# Altium PCB PCB1-LTC2949-V1.PcbDoc
Units mil, origin at the board's own origin, x right, y up, seen from the top; angles counter-clockwise.
Board outline 2590 x 2600 mil, 2 copper layers (Top Layer, Bottom Layer); 50 components, 52 nets, 164 pads, 8 vias.
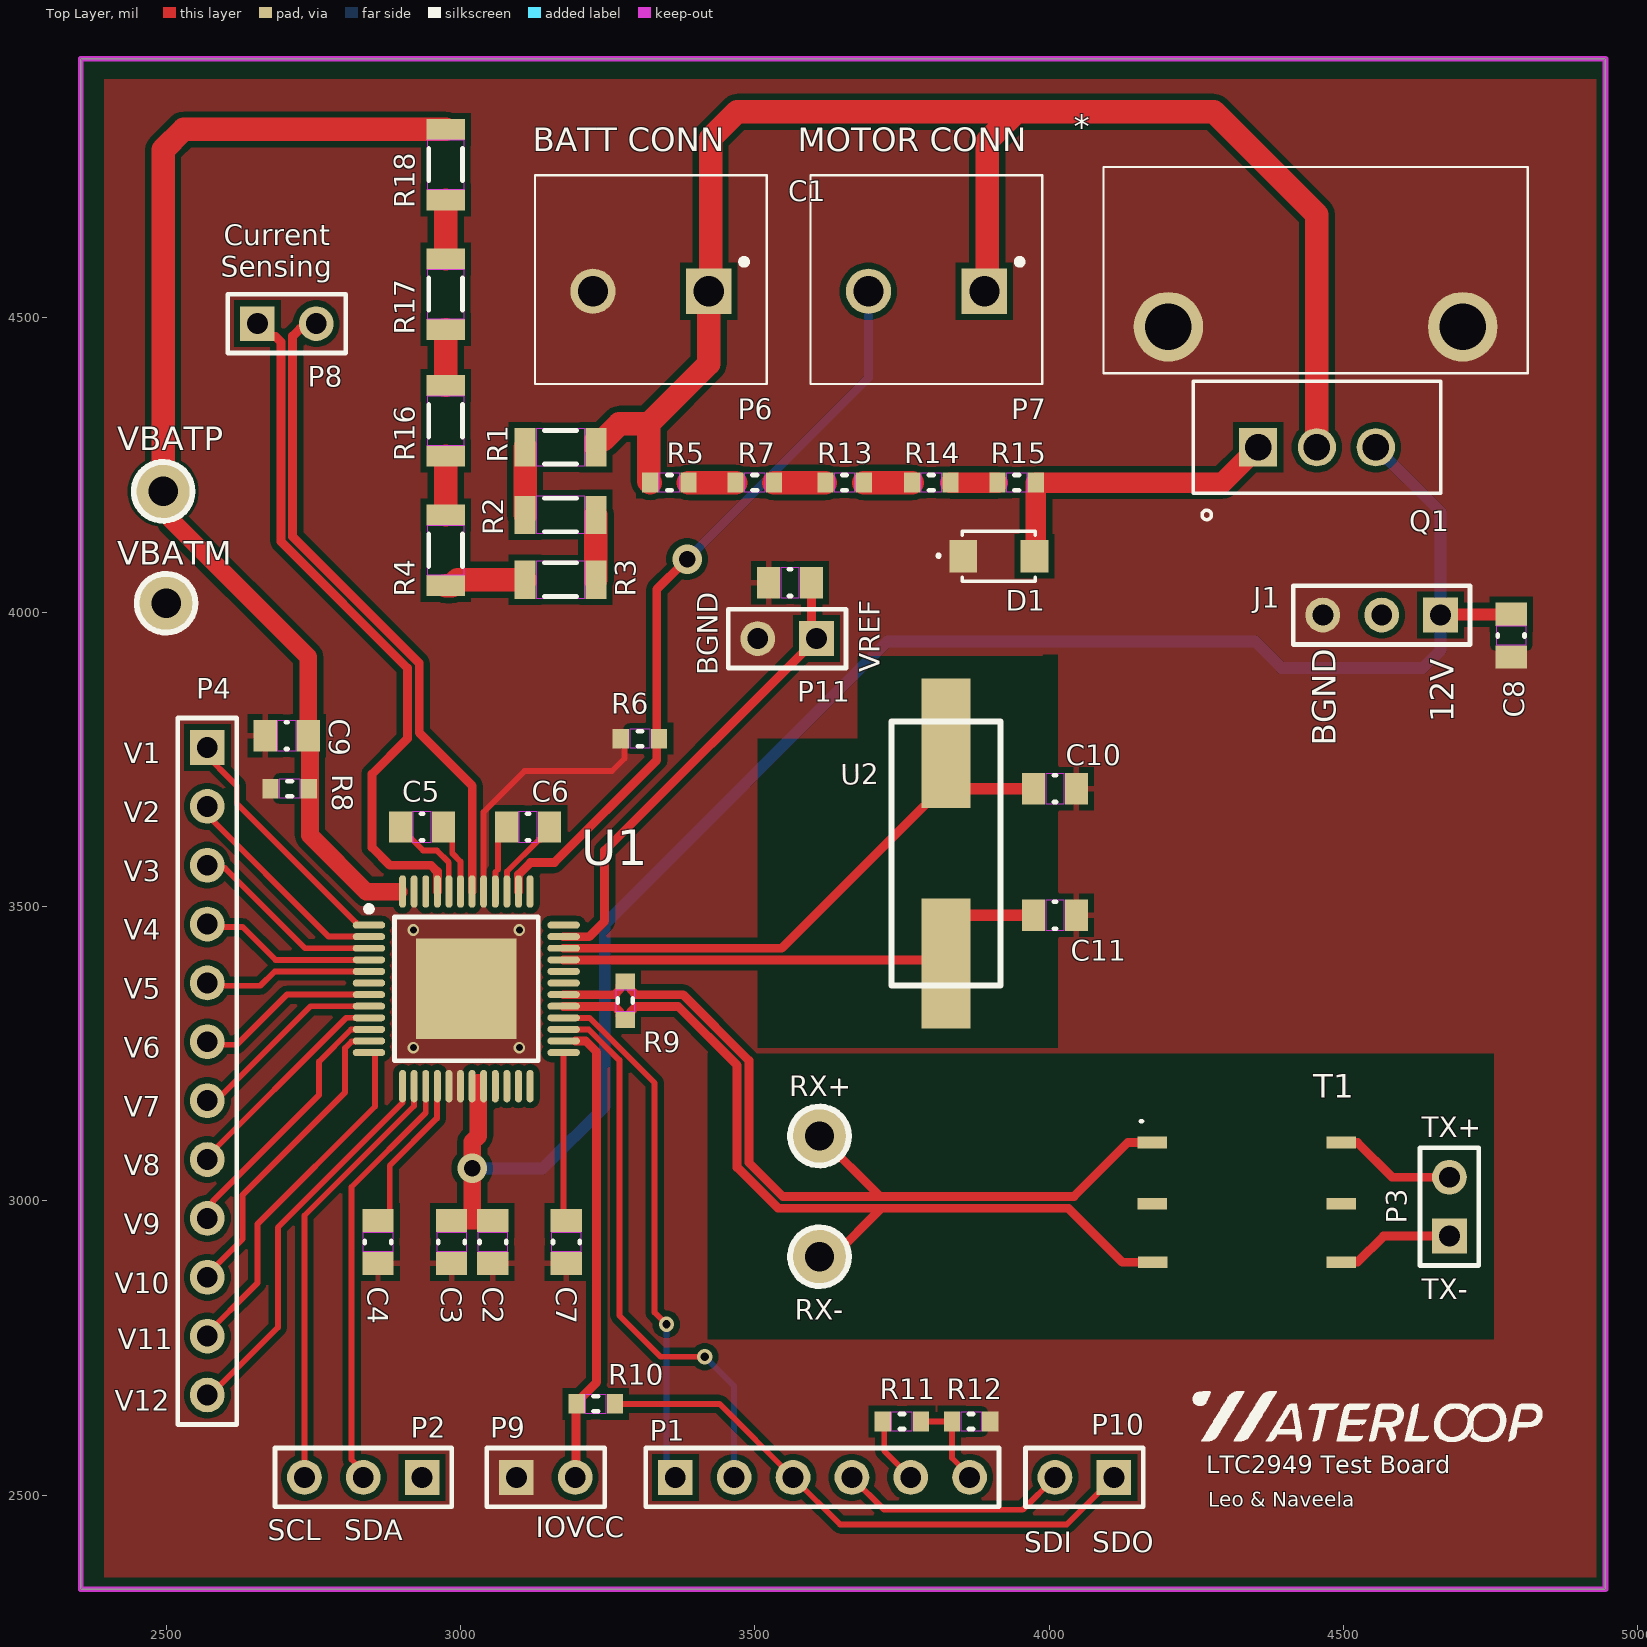
[diagram p0: Top Layer view]
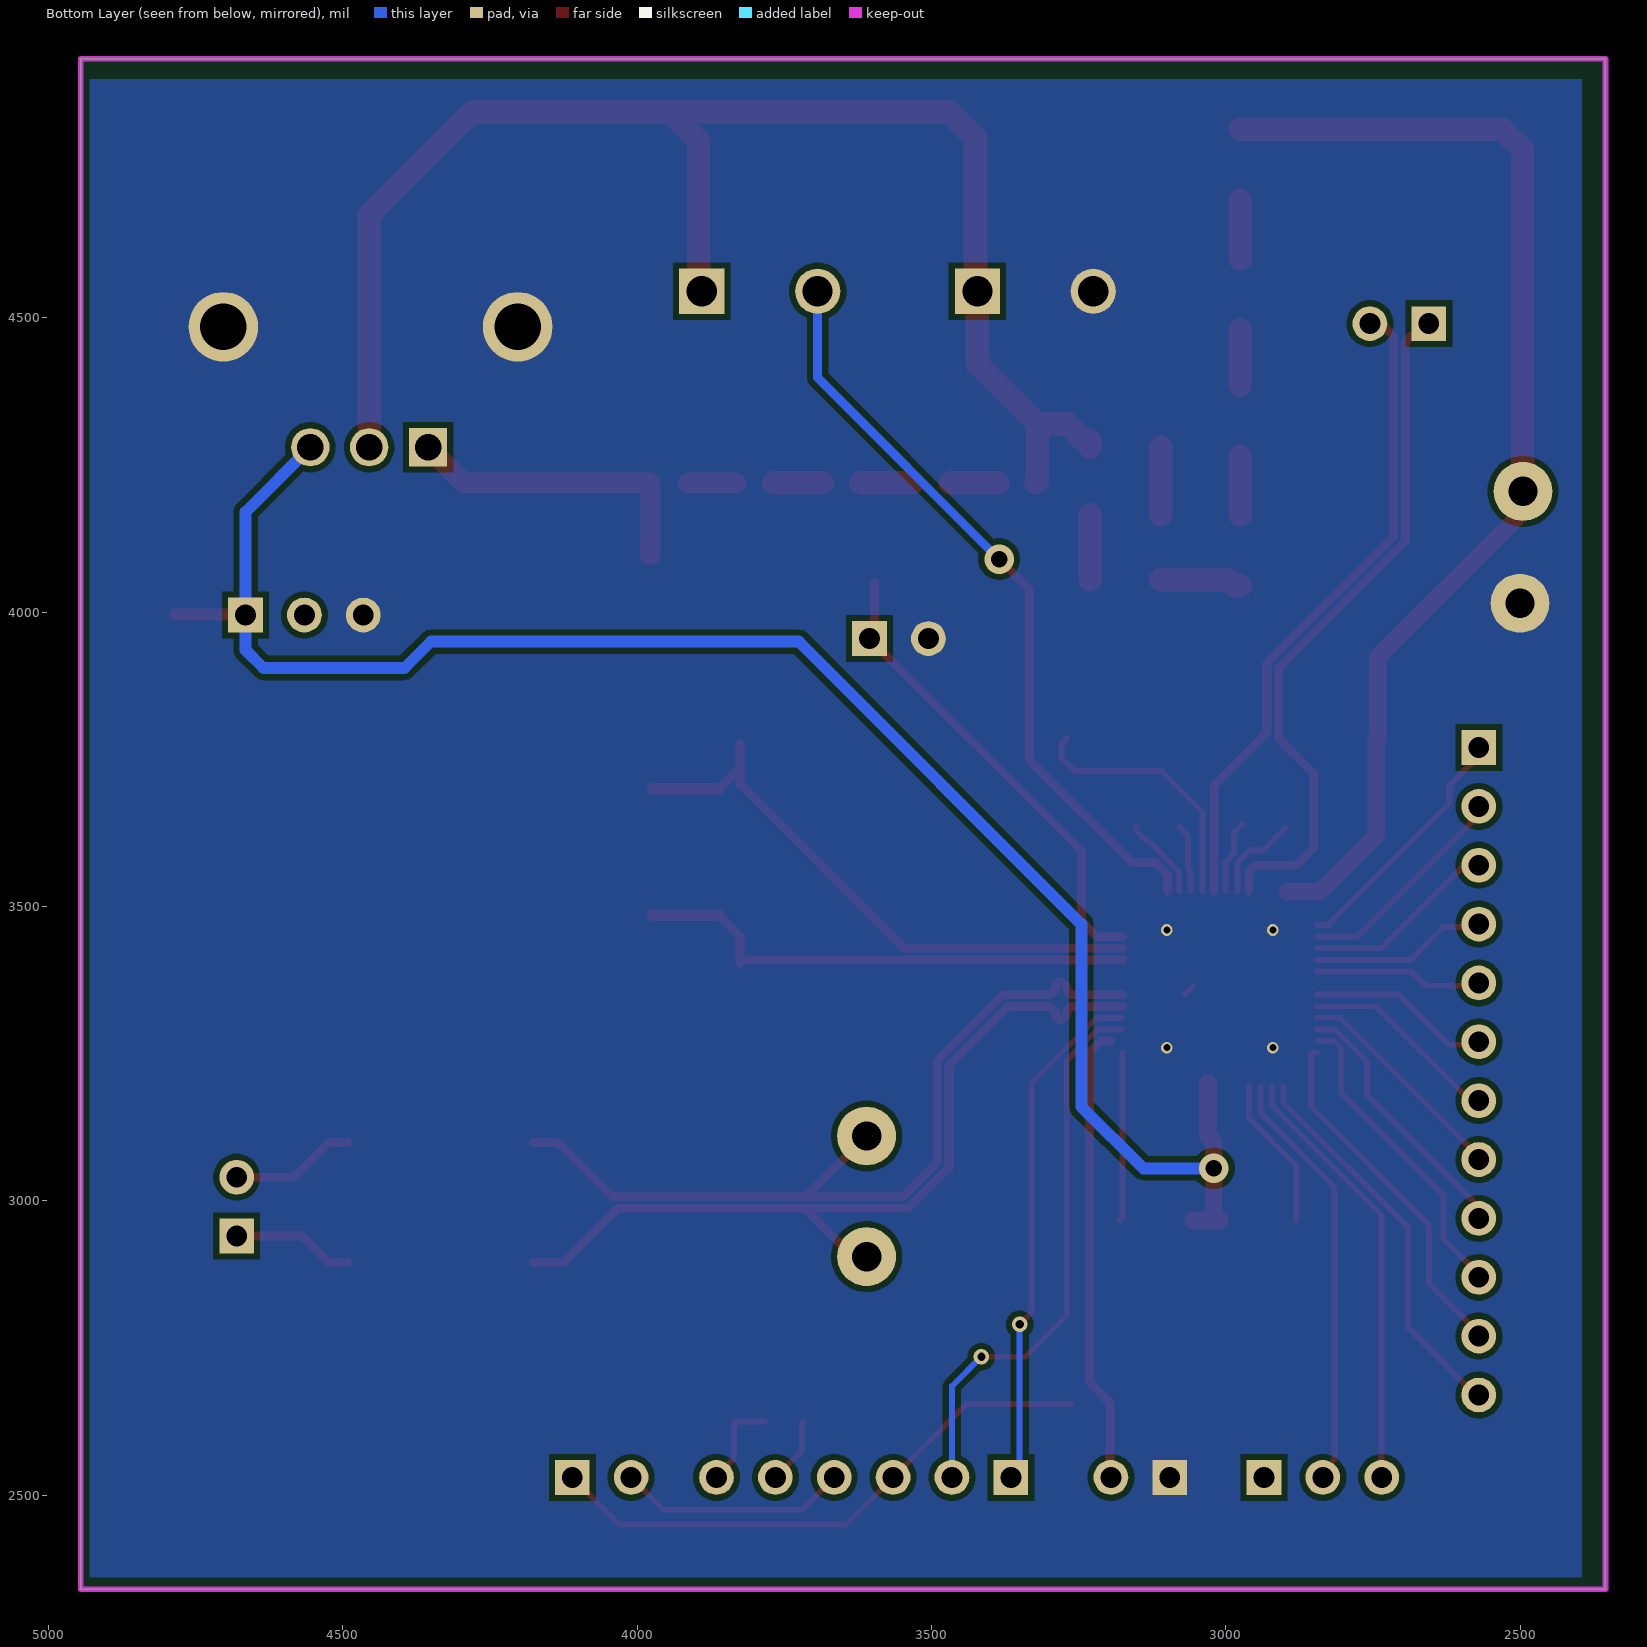
[diagram p1: Bottom Layer view, seen from below]
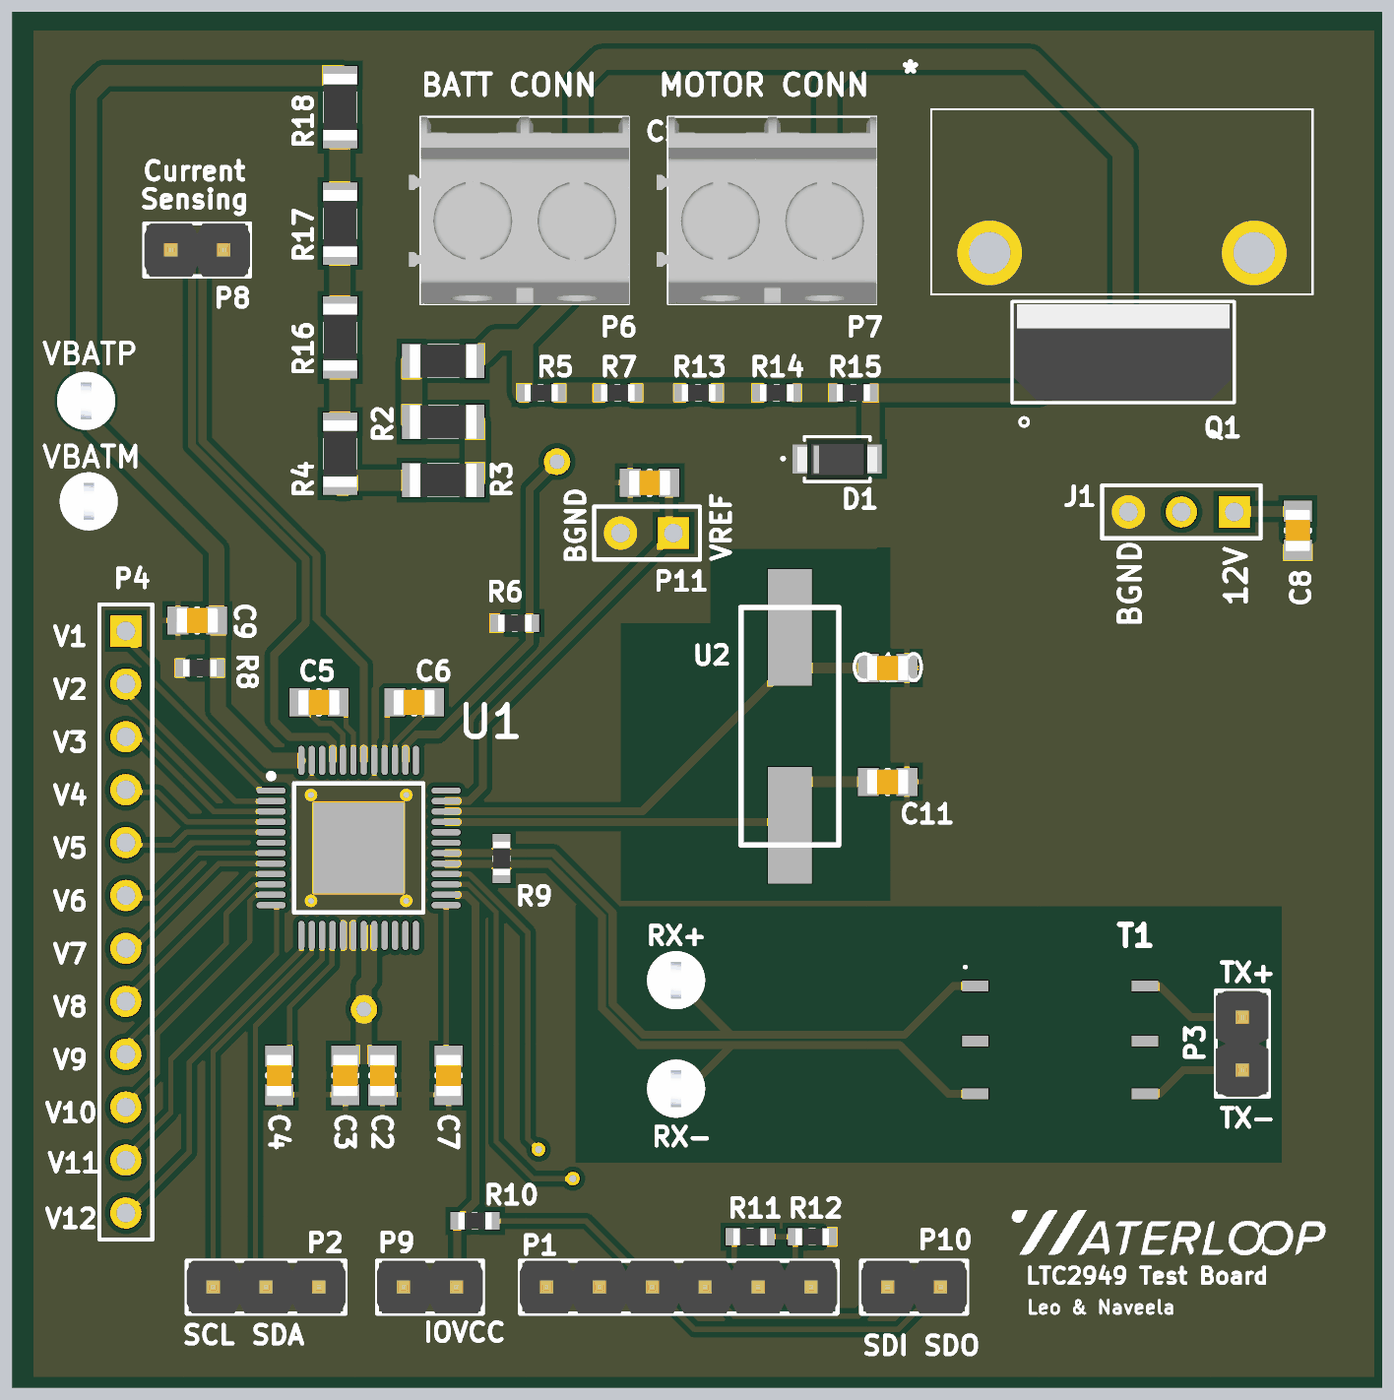
[diagram p2: 3D render of the assembled board from above, using the file's embedded part models]

## Layer stack, top to bottom
Top Solder: solder mask 0.4, Solder Resist, Dk 3.5
Top Layer: signal copper 1.4
Dielectric 1: dielectric 12.6, FR-4, Dk 4.8
Bottom Layer: signal copper 1.4
Bottom Solder: solder mask 0.4, Solder Resist, Dk 3.5

## Board outline
2355,2340 2355,4940 4945,4940 4945,2340

## Design rules (kind name [scope] priority, off if disabled: settings)
Clearance [All] p1: gap=10 ignorepadtopadclearanceinfootprint=FALSE except(5: Arc-Arc Arc-Track Arc-SMDPad Track-Track Track-SMDPad SMDPad-SMDPad)
DiffPairsRouting [All] p1: maxlimit=10 minlimit=4 mostfreqgap=5 toplayer_minwidth=10 toplayer_maxwidth=25 toplayer_prefwidth=15 bottomlayer_minwidth=10 bottomlayer_maxwidth=25 bottomlayer_prefwidth=15 maxuncoupledlength=500
PolygonConnect PolygonConnect_11 [All vs InComponent('C11')] p1: connectstyle=Relief reliefconductorwidth=10 reliefentries=4 polygonreliefangle="90 Angle" airgapwidth=10
PolygonConnect PolygonConnect_10 [All vs InComponent('C10')] p2: connectstyle=Relief reliefconductorwidth=10 reliefentries=4 polygonreliefangle="90 Angle" airgapwidth=10
PolygonConnect PolygonConnect_9 [All vs IsNamedPolygon('BGND_L01_P005') AND InComponent('C10')] p3: connectstyle=Relief reliefconductorwidth=10 reliefentries=4 polygonreliefangle="90 Angle" airgapwidth=10
PolygonConnect PolygonConnect_8 [All vs InComponent('C2') OR InComponent('C3') OR InComponent('C4') OR InComponent('C5') OR InComponent('C6') OR InComponent('C7') OR InComponent('C9')] p4: connectstyle=Relief reliefconductorwidth=10 reliefentries=4 polygonreliefangle="90 Angle" airgapwidth=10
PolygonConnect PolygonConnect_7 [All vs InComponent('C1')] p5: connectstyle=Relief reliefconductorwidth=10 reliefentries=4 polygonreliefangle="90 Angle" airgapwidth=10
PolygonConnect PolygonConnect_6 [All vs IsNamedPolygon('BGND_L01_P005')] p6: connectstyle=Direct reliefconductorwidth=10 reliefentries=4 polygonreliefangle="90 Angle" airgapwidth=10
PolygonConnect PolygonConnect_5 [All vs IsNamedPolygon('BGND_L01_P005')] p7: connectstyle=Relief reliefconductorwidth=10 reliefentries=4 polygonreliefangle="90 Angle" airgapwidth=10
PolygonConnect PolygonConnect_4 [All vs IsNamedPolygon('BGND_L01_P005') AND InComponent('C1')] p8: connectstyle=Relief reliefconductorwidth=10 reliefentries=4 polygonreliefangle="90 Angle" airgapwidth=10
PolygonConnect "Thermal Relief" [All vs (InComponent('C1') AND InComponent('C2') AND InComponent('C3') AND InComponent('C4') AND InComponent('C5') AND InComponent('C6') AND InComponent('C7') AND InComponent('C9'))] p9: connectstyle=Relief reliefconductorwidth=10 reliefentries=4 polygonreliefangle="90 Angle" airgapwidth=10
PolygonConnect PolygonConnect_3 [All vs IsNamedPolygon('BGND_L02_P006')] p10: connectstyle=Direct reliefconductorwidth=10 reliefentries=4 polygonreliefangle="90 Angle" airgapwidth=10
PolygonConnect "Direct Connect" [All vs IsNamedPolygon('BGND_L01_P005')] p11: connectstyle=Direct reliefconductorwidth=10 reliefentries=4 polygonreliefangle="90 Angle" airgapwidth=10
PolygonConnect PolygonConnect_2 [All vs IsNamedPolygon('BGND_L01_P005')] p12: connectstyle=Direct reliefconductorwidth=10 reliefentries=4 polygonreliefangle="90 Angle" airgapwidth=10
PolygonConnect PolygonConnect_1 [All vs IsNamedPolygon('BGND_L01_P005')] p13: connectstyle=Direct reliefconductorwidth=10 reliefentries=4 polygonreliefangle="90 Angle" airgapwidth=10
PolygonConnect [All] p14: connectstyle=Relief reliefconductorwidth=10 reliefentries=4 polygonreliefangle="90 Angle" airgapwidth=10
RoutingVias [All] p1: holewidth=28 width=50 viastyle="Through Hole" minholewidth=28 minwidth=50 maxholewidth=28 maxwidth=50
SolderMaskExpansion [All] p1: expansion=1.97 istentingtop=FALSE
Width [All] p1: maxlimit=40 minlimit=10 preferedwidth=15 minimp=50.000000 maximp=50.000000 favimp=50.000000
29 further rules are at their usual default settings.

## Classes and differential pairs
net class V[1..12]: V1 V2 V3 V4 V5 V6 V7 V8 V9 V10 V11 V12
component class "MAIN IC": C1 C2 C3 C4 C5 C6 C7 C8 C9 C10 C11 "Cur Sensing" D1 J1 P1 P8 P9 Q1 R1 R2 R3 R4 R5 R6 R7 R8 R9 R10 R11 R12 R13 R14 R15 R16 R17 R18 RX+ RX- T1 U1 U2 VBATM VBATP
component class CONNECTORS: * P2 P3 P4 P6 P7 P10 P11
differential pair I1: +I1_P -I1_N
differential pair TX: +TX_P -TX_N
differential pair RX: +RX_P -RX_N

## Components (designator, comment, footprint, x,y, rotation, side; value= is the part's Value field where it differs from the comment)
* "Heatsink" "10C/W Vertical Heatsink with Pins for TO-220" 4455,4485 r0 top
C1 "Capacitor - Nonpolarized" "0805 - Capacitor" 3560,4050 r0 top value=1uF
C2 "Nonpolarized Capacitor" "0805 - Capacitor" 3055,2930 r270 top value=1uF
C3 "Nonpolarized Capacitor" "0805 - Capacitor" 2985,2930 r270 top value=1uF
C4 "Nonpolarized Capacitor" "0805 - Capacitor" 2860,2930 r270 top value=1uF
C5 "Nonpolarized Capacitor" "0805 - Capacitor" 2935,3635 r0 top value=1uF
C6 "Nonpolarized Capacitor" "0805 - Capacitor" 3115,3635 r0 top value=1uF
C7 "Nonpolarized Capacitor" "0805 - Capacitor" 3180,2930 r270 top value=1uF
C8 "Nonpolarized Capacitor" "0805 - Capacitor" 4785,3960 r270 top value=0.1uF
C9 "Nonpolarized Capacitor" "0805 - Capacitor" 2705,3790 r0 top value=4.7nF
C10 "Nonpolarized Capacitor" "0805 - Capacitor" 4010,3700 r180 top value=33pF
C11 "Nonpolarized Capacitor" "0805 - Capacitor" 4010,3485 r180 top value=33pF
D1 "Zener" "BZD27C - ZENER DIODES" 3915,4095 r0 top
J1 "1x3 Header" HDR1X3 4665,3995 r180 top
P1 "1x6 Header" HDR1X6 3365,2530 r0 top
P2 "1x3 Header" HDR1X3 2935,2530 r180 top
P3 "1x2 Header" HDR1X2 4680,2940 r90 top
P4 "1x12 Header" HDR1X12 2570,3770 r270 top
P6 "1935161" 1935161 3316.85,4545 r180 top
P7 "1935161" 1935161 3785,4545 r180 top
P8 "1x2 Header" HDR1X2 2655,4490 r0 top
P9 "1x2 Header" HDR1X2 3095,2530 r0 top
P10 "1x2 Header" HDR1X2 4110,2530 r180 top
P11 "1x2 Header" HDR1X2 3605,3955 r180 top
Q1 "NPN" "BJT NPN 800 V 4 A - 90 W Through Hole TO-220" 4454.06,4279.17 r0 top
R1 "Resistor" "1206 - Resistor" 3170,4280 r0 top value=49.9k
R2 "Resistor" "1206 - Resistor" 3170,4165 r180 top value=49.9k
R3 "Resistor" "1206 - Resistor" 3170,4055 r0 top value=49.9k
R4 "Resistor" "1206 - Resistor" 2975,4105 r270 top value=49.9k
R5 "Resistor" "0603 - Resistor" 3355,4220 r180 top value=6.49k
R6 "Resistor" "0603 - Resistor" 3305,3785 r0 top value=100m
R7 "Resistor" "0603 - Resistor" 3500,4220 r180 top value=6.49k
R8 "Resistor" "0603 - Resistor" 2710,3700 r0 top value=10k
R9 "Resistor" "0603 - Resistor" 3280,3340 r90 top value=120
R10 "Resistor" "0603 - Resistor" 3230,2655 r0 top value=5k
R11 "Resistor" "0603 - Resistor" 3750,2625 r180 top value=3k
R12 "Resistor" "0603 - Resistor" 3867.52,2625 r0 top value=1k
R13 "Resistor" "0603 - Resistor" 3652.52,4220 r180 top value=6.49k
R14 "Resistor" "0603 - Resistor" 3800,4220 r180 top value=6.49k
R15 "Resistor" "0603 - Resistor" 3945,4220 r180 top value=6.49k
R16 "Resistor" "1206 - Resistor" 2975,4325 r270 top value=49.9k
R17 "Resistor" "1206 - Resistor" 2975,4540 r270 top value=49.9k
R18 "Resistor" "1206 - Resistor" 2975,4760 r270 top value=49.9k
RX+ "Test Point" "Test Point - 5002" 3610,3110 r90 top
RX- "Test Point" "Test Point - 5002" 3610,2905 r90 top
T1 "HM2101NLT" HM2101NLT 4335,2995 r270 top
U1 "LTC2949" LTC2949 3010,3360 r0 top
U2 "ABLS-4.000MHZ-K4T" ABLS_4MHZ-K4T 3825,3590 r270 top
VBATM "Test Point" "Test Point - 5002" 2500,4015 r90 top
VBATP "Test Point" "Test Point - 5002" 2495,4205 r90 top

## Footprints (in the part's own frame and the unit in brackets; to place one, negate y for a bottom-side part, rotate by r counter-clockwise, add the part's x,y. Pads: shape width x height; smd on the part's side, far side on the other; paste and mask are expansions set on the pad)
"10C/W Vertical Heatsink with Pins for TO-220" [mm]
  round 3 hole 2: 1(-6.409,-0.011) 2(6.291,-0.011)
  silkscreen extent -9.21,-2.01 9.09,6.89
"0603 - Resistor" [mm] "0603 Chip Resistor - IPC Medium Density"
  rect 0.7x0.85 smd: 1(-0.825,0) 2(0.825,0)
  Top Layer keep-out region: -0.45,0.4 -0.45,-0.4 0.45,-0.4 0.45,0.4
  silkscreen extent -0.1,-0.33 0.1,0.33, body extent -0.8,-0.4 0.8,0.4, height 0.45
"0805 - Capacitor" [mm] "0805 Chip Capacitor - IPC Medium Density"
  rect 1x1.35 smd: 1(-0.925,0) 2(0.925,0)
  Top Layer keep-out region: -0.4,0.65 -0.4,-0.65 0.4,-0.65 0.4,0.65
  silkscreen extent -0.05,-0.58 0.05,0.58, body extent -1,-0.6 1,0.6, height 1.2
"1206 - Resistor" [mm] "1206 Chip Resistor - IPC Medium Density"
  rect 0.9x1.65 smd: 1(-1.525,0) 2(1.525,0)
  Top Layer keep-out region: -1.05,0.8 -1.05,-0.8 1.05,-0.8 1.05,0.8
  silkscreen extent -0.7,-0.72 0.7,0.72, body extent -1.6,-0.8 1.6,0.8, height 0.55
1935161 [mm] "Phoenix Contact 1x2 Screw Terminal Block"
  rect 1.95x1.95 hole 1.3: 1(-2.667,0)
  round 1.95 hole 1.3: 2(2.333,0)
  silkscreen extent -5.17,-5 4.83,4, body extent -5.19,-5 5.38,4, height 12.22
ABLS_4MHZ-K4T [mm]
  rect 5.6x2.1 smd: 1(-4.75,0) 2(4.75,0)
  silkscreen extent -5.7,-2.35 5.7,2.35
"BJT NPN 800 V 4 A - 90 W Through Hole TO-220" [mil]
  round 65 hole 45: 1(0.94,0.83) 3(100.94,0.83)
  rect 65x65 hole 45: 2(-99.06,0.83)
  silkscreen extent -209,-122 211,113, body extent -204,-73 206,108, height 776
"BZD27C - ZENER DIODES" [mm]
  rect 1.2x1.4 smd paste+0 mask+0: 1(-1.548,-0.009) 2(1.526,-0.009)
  silkscreen extent -2.62,-1.09 1.56,1.07, body extent -1.91,-0.97 1.9,0.93, height 1.43
HDR1X2 [mm] "Connector; Header; 2 Position"
  rect 1.5x1.5 hole 0.9: 1(0,0)
  round 1.5 hole 0.9: 2(2.54,0)
  silkscreen extent -1.27,-1.27 3.81,1.27, body extent -1.27,-1.27 3.81,1.27, height 8.54
HDR1X3 [mm] "Connector; Header; 3 Position"
  rect 1.5x1.5 hole 0.9: 1(0,0)
  round 1.5 hole 0.9: 2(2.54,0) 3(5.08,0)
  silkscreen extent -1.27,-1.27 6.35,1.27
HDR1X6 [mm] "Connector; Header; 6 Position"
  rect 1.5x1.5 hole 0.9: 1(0,0)
  round 1.5 hole 0.9: 2(2.54,0) 3(5.08,0) 4(7.62,0) 5(10.16,0) 6(12.7,0)
  silkscreen extent -1.27,-1.27 13.97,1.27, body extent -1.27,-1.27 13.97,1.27, height 8.54
HDR1X12 [mm] "Connector; Header; 12 Position"
  rect 1.5x1.5 hole 0.9: 1(0,0)
  round 1.5 hole 0.9: 2(2.54,0) 3(5.08,0) 4(7.62,0) 5(10.16,0) 6(12.7,0) 7(15.24,0) 8(17.78,0) 9(20.32,0) 10(22.86,0) 11(25.4,0) 12(27.94,0)
  silkscreen extent -1.27,-1.27 29.21,1.27
HM2101NLT [mm]
  rect 0.51x1.27 smd: 1(-2.64,-4.05) 2(0,-4.05) 3(2.53,-4.045) 4(2.53,4.095) 5(0,4.095) 6(-2.64,4.095)
  silkscreen extent -3.55,-4.55 -3.55,-4.5, body extent -3.88,-4.35 3.78,4.45, height 0.25
LTC2949 [mm] "LQFP, 48-Leads, IPC Medium Density"
  oval 1.4x0.3 smd mask+0.05: 1(-4.2,2.75) 2(-4.2,2.25) 3(-4.2,1.75) 4(-4.2,1.25) 5(-4.2,0.75) 6(-4.2,0.25) 7(-4.2,-0.25) 8(-4.2,-0.75) 9(-4.2,-1.25) 10(-4.2,-1.75) 11(-4.2,-2.25) 12(-4.2,-2.75) 25(4.2,-2.75) 26(4.2,-2.25) 27(4.2,-1.75) 28(4.2,-1.25) 29(4.2,-0.75) 30(4.2,-0.25) 31(4.2,0.25) 32(4.2,0.75) 33(4.2,1.25) 34(4.2,1.75) 35(4.2,2.25) 36(4.2,2.75)
  oval 0.3x1.4 smd mask+0.05: 13(-2.75,-4.2) 14(-2.25,-4.2) 15(-1.75,-4.2) 16(-1.25,-4.2) 17(-0.75,-4.2) 18(-0.25,-4.2) 19(0.25,-4.2) 20(0.75,-4.2) 21(1.25,-4.2) 22(1.75,-4.2) 23(2.25,-4.2) 24(2.75,-4.2) 37(2.75,4.2) 38(2.25,4.2) 39(1.75,4.2) 40(1.25,4.2) 41(0.75,4.2) 42(0.25,4.2) 43(-0.25,4.2) 44(-0.75,4.2) 45(-1.25,4.2) 46(-1.75,4.2) 47(-2.25,4.2) 48(-2.75,4.2)
  rect 4.35x4.35 smd: 49(0,0)
  silkscreen extent -4.32,-3.1 3.1,3.57, body extent -3.5,-3.5 3.5,3.5, height 1.6
"Test Point - 5002" [mil] "5002 - PCB TEST POINT WHITE .040"
  round 100 hole 50: 1(0,0)
  silkscreen extent -50,-50 50,50, body extent -50,-50 50,50, height 180

## Part data
*: "Vertical Heatsink for TO-220 Package"
C1: "Nonpolarized Capacitor"
C2 C3 C4 C5 C6 C7 C8 C9 C10 C11: library part "Capacitor - Nonpolarized"
D1: "Zener Diode"
J1 P2: "1x3 Pin Header"
P1: "1x6 Pin Header"
P3 P8 P9 P10 P11: "1x2 Pin Header"
P4: "1x12 Pin Header"
P6 P7: "1x2 Screw Terminal Block", Manufacturer="CUI Devices", Manufacturer Part Number=TB002-500-02BE, Supplier Part Number=102-6145-ND, Supplier=Digikey
Q1: "NPN Bipolar Transistor"
T1: "Pulse Transformer 1:1 Surface Mount 150µH, 450µH"
U1: Manufacturer="Analog Devices", Manufacturer Part Number=LTC2949ILXE#3ZZPBF, Supplier Part Number=584-2949ILXE3ZZPBF, Supplier=Mouser
U2: "Crystal Oscillator 4MHz 18pF"

## Via types
v1: diameter 19.68, hole 11.81, Top Layer to Bottom Layer, 4 vias
v2: diameter 50, hole 28, Top Layer to Bottom Layer, 2 vias
v3: diameter 26, hole 14, Top Layer to Bottom Layer, 2 vias

## Nets (pads, with @x,y where several pads share a name; then routed paths per layer and width w, separated by ;. In a path a pad name is that pad's centre, name@x,y a point inside that pad or via, vN(x,y) a via of type N, cw(c..) or ccw(c..) an arc to the next point about the centre after c; other vN are vias at no path point)
+12: C2.1 C3.1 C8.1 J1.1 Q1.3 U1.19 U1.20 | length 3022
  Top Layer w20: J1.1 4665.71,3995.71 4784.29,3995.71 C8.1
  Top Layer w30: C3.1@3010,2966.42 3020,2966.42 ; 3030,3200 3030,3110 3020,3100 v2(3020,3055) 3020,2966.42 ; C2.1 3020,2966.42
  Bottom Layer w20: v2(3020,3055) 3140,3055 3245,3160 3245,3470 3725,3950 4350,3950 4395,3905 4634.53,3905 4665,3935.47 J1.1 4665,4170 Q1.3
BGND: *.1 *.2 C1.1 C2.2 C3.2 C4.2 C7.2 C8.2 C9.1 C10.1 C11.1 D1.1 J1.3 P6.2 P9.1 P11.2 R6.1 R8.1 R12.2 U1.17 U1.18 U1.41 U1.47 U1.49 VBATM.1 | length 467.3
  Top Layer w10: U1.41 3039.53,3660.41 3109.12,3730 3257.41,3730 3278.66,3751.25 3278.66,3776.97 R6.1@3270.63,3785 ; U1.49@3056.87,3363.16 U1.49@3069.87,3350.16
  other v1: 2920,3260 3100,3260 2920,3460 3100,3460
CLKI: C11.2 U1.33 U2.2 | length 861.5
  Top Layer w15: U1.33 3818.78,3409.21 U2.2 3825,3448.66 U2.2@3861.34,3485
  Top Layer w20: U2.2@3861.34,3485 C11.2
CLKO: C10.2 U1.34 U2.1 | length 997.8
  Top Layer w15: U1.34 3545.79,3428.9 3825,3708.11 U2.1@3825,3736.34 ; U2.1 U2.1@3825,3736.34 ; U2.1@3861.34,3700 U2.1@3825,3736.34
  Top Layer w20: U2.1@3861.34,3700 C10.2
I1_N: P8.2 U1.42 | length 1118.6
  Top Layer w15: P8.2 2746.57,4481.57 2727.72,4481.57 2715,4468.85 2715,4128.28 2930,3913.28 2930,3795 3020,3705 U1.42@3020,3525.35
I1_P: P8.1 U1.45 | length 1187.4
  Top Layer w15: P8.1 2677.03,4467.97 2686.21,4467.97 2695,4459.19 2695,4120 2910,3905 2910,3785 2850,3725 2850,3600 2880,3570 2950,3570 2960.79,3559.21 U1.45
IOVCC: P9.2 R10.1 U1.26 | length 781.4
  Top Layer w15: P9.2 3196.26,2531.26 3196.26,2653.74 R10.1 3197.52,2657.95 3231.29,2691.72 3231.29,3252.75 3212.62,3271.42 U1.26@3195.41,3271.42
NetC4_1: C4.1 U1.16 | length 261.7
  Top Layer w10: C4.1@2880,2966.42 2880,3060 2960,3140 2960,3193.86 U1.16
NetC5_1: C5.1 U1.44 | length 155.3
  Top Layer w10: C5.1@2898.58,3633.11 2936.69,3595 2960,3595 2980.13,3574.87 2980.13,3525.7 U1.44
NetC5_2: C5.2 U1.43 | length 126.6
  Top Layer w10: C5.2@2971.42,3640 2986.1,3625.31 2986.1,3590.16 3000.16,3576.11 U1.43
NetC6_1: C6.1 U1.40 | length 117.7
  Top Layer w10: U1.40@3060,3525.35 3059.56,3525.8 3059.56,3558.21 3063.9,3562.55 3063.9,3620.31 C6.1
NetC6_2: C6.2 U1.39 | length 141.6
  Top Layer w10: U1.39 3079.24,3525.7 3079.24,3559.29 3133.38,3613.43 3136.73,3613.43 3151.42,3628.11 C6.2
NetC7_1: C7.1 U1.25 | length 287.2
  Top Layer w10: U1.25 3175.35,2971.06 C7.1
NetC9_2: C9.2 R8.2 R18.1 U1.48 VBATP.1 | length 1952.4
  Top Layer w30: VBATP.1 2508.39,4191.61 2508.39,4156.61 2741.42,3923.58 C9.2 2744.37,3787.05 2744.37,3700 2744.37,3620.63 2840,3525 2895,3525
  Top Layer w40: VBATP.1 2495,4785 2530.04,4820.04 R18.1
NetD1_2: D1.2 Q1.2 R15.1 | length 528.7
  Top Layer w15: D1.2 D1.2@3977.48,4097.06
  Top Layer w35: D1.2@3977.48,4097.06 R15.1 4295,4220 Q1.2
NetP1_1: P1.1 U1.28 | length 884.4
  Top Layer w10: U1.28@3175.8,3310.44 3219.56,3310.44 3330,3200 3330,2810 v3(3350,2790)
  Bottom Layer w10: v3(3350,2790) 3350,2545 P1.1
NetP1_2: P1.2 U1.27 | length 949.8
  Top Layer w10: U1.27 3175.58,3290.87 3217.91,3290.87 3270,3238.79 3270,2805 3340,2735 v3(3415,2735)
  Bottom Layer w10: v3(3415,2735) 3465,2685 P1.2
NetP1_3: P1.3 P10.1 R10.2 | length 965.6
  Top Layer w10: R10.2 3440,2655 P1.3 3645,2450 4030,2450 P10.1
NetP1_4: P1.4 P10.2 | length 390.6
  Top Layer w10: P1.4 3720,2475 3955,2475 P10.2
NetP1_5: P1.5 R11.2 | length 114.7
  Top Layer w10: R11.2 3720,2622.52 3720,2575 P1.5
NetP1_6: P1.6 R11.1 R12.1 | length 160
  Top Layer w10: R11.1 R12.1 R12.1 3835,2562.97 3865,2532.97 P1.6
NetP2_2: P2.2 U1.15 | length 725.2
  Top Layer w10: P2.2 2835,2540.39 2815,2560.39 2815,3023.28 2941.1,3149.39 U1.15
NetP2_3: P2.3 U1.14 | length 741.9
  Top Layer w10: P2.3 2735,2975 2921.07,3161.07 2921.07,3194.3 U1.14
NetP7_2: P7.2 R6.2 U1.38 | length 1282.5
  Top Layer w15: U1.38 3098.93,3525.7 3098.93,3554.23 3119.25,3574.54 3159.54,3574.54 3333.62,3748.62 3333.62,3785 3333.62,4038.62 v2@3380,4085
  Bottom Layer w15: v2(3385,4090) 3693.15,4398.15 P7.2
NetR1_1: R1.1 R2.2 | length 115
  Top Layer w40: R2.2 R1.1
NetR2_1: R2.1 R3.2 | length 110
  Top Layer w40: R3.2 R2.1
NetR3_1: R3.1 R4.2 | length 139.1
  Top Layer w40: R4.2 2985.2,4044.96 2995.24,4055 R3.1
NetR4_1: R4.1 R16.2 | length 99.9
  Top Layer w40: R4.1 R16.2
NetR5_1: R5.1 R7.2 | length 80
  Top Layer w40: R5.1 R7.2
NetR7_1: R7.1 R13.2 | length 87.6
  Top Layer w40: R7.1 R13.2
NetR13_1: R13.1 R14.2 | length 82.5
  Top Layer w40: R13.1 R14.2
NetR14_1: R14.1 R15.2 | length 80
  Top Layer w35: R14.1 R15.2
NetR16_1: R16.1 R17.2 | length 94.9
  Top Layer w40: R16.1 R17.2
NetR17_1: R17.1 R18.2 | length 99.9
  Top Layer w40: R17.1 R18.2
RX_N: R9.1 RX-.1 T1.3 U1.29 | length 1436.4
  Top Layer w15: U1.29@3175.35,3330 3261.98,3330 3270.77,3321.21 R9.1@3270.77,3313.8 ; R9.1 3282.95,3307.52 3289.23,3313.8 3289.23,3321.21 3298.02,3330 3370,3330 3470,3230 3470,3056.72 3539.59,2987.12 3715,2987.12 ; RX-.1 3632.88,2905 3715,2987.12 ; T1.3 4124.61,2895.39 4032.88,2987.12 3715,2987.12
RX_P: R9.2 RX+.1 T1.1 U1.30 | length 1442.7
  Top Layer w15: U1.30@3175.35,3350 3261.98,3350 3270.77,3358.79 R9.2@3270.77,3366.2 ; R9.2 3282.95,3372.48 3289.23,3366.2 3289.23,3358.79 3298.02,3350 3378.28,3350 3490,3238.28 3490,3065 3547.88,3007.12 3712.88,3007.12 ; RX+.1 3712.88,3007.12 ; T1.1 4133.94,3098.94 4042.12,3007.12 3712.88,3007.12
TX_N: P3.1 T1.4 | length 207.3
  Top Layer w15: T1.4@4491.22,2895.39 4523.72,2895.39 4568.33,2940 P3.1
TX_P: P3.2 T1.6 | length 213.2
  Top Layer w15: T1.6@4491.22,3098.94 4523.72,3098.94 4582.66,3040 P3.2
V1: P4.1 U1.1 | length 427
  Top Layer w10: P4.1@2560,3765 2620.06,3704.94 2620.06,3674.94 2822.65,3472.35 2822.65,3469.1 2823.48,3468.27 U1.1
V2: P4.2 U1.2 | length 374.3
  Top Layer w10: P4.2@2560,3665 2776.42,3448.58 U1.2
V3: P4.3 U1.3 | length 341
  Top Layer w10: P4.3@2560,3565 2600,3565 2736.1,3428.9 U1.3
V4: P4.4 U1.4 | length 307.8
  Top Layer w10: P4.4@2560,3465 2630,3465 2685.79,3409.21 U1.4
V5: P4.5 U1.5 | length 294.8
  Top Layer w10: P4.5@2560,3365 2560.16,3365.16 2660.16,3365.16 2684.53,3389.53 U1.5
V6: P4.6 U1.7 | length 319.9
  Top Layer w10: P4.6@2560,3265 2620,3265 2705.16,3350.16 U1.7
V7: P4.7 U1.8 | length 353.2
  Top Layer w10: P4.7@2560,3165 2569.39,3174.39 2589.39,3174.39 2745.47,3330.47 U1.8
V8: P4.8 U1.9 | length 386.5
  Top Layer w10: P4.8@2560,3065 2805.79,3310.79 U1.9
V9: P4.9 U1.10 | length 451
  Top Layer w10: P4.9@2567.5,2972.5 2579.39,2984.39 2579.39,2999.39 2760,3180 2760,3236.51 2814.24,3290.76 2844.3,3290.76 U1.10
V10: P4.10 U1.11 | length 540.5
  Top Layer w10: P4.10@2560,2865 2630,2935 2630,3010 2804.21,3184.21 2804.21,3259.51 2815.21,3270.51 2821.6,3270.51 2822.16,3271.07 U1.11@2844.3,3271.07
V11: P4.11 U1.12 | length 618.8
  Top Layer w10: P4.11@2560,2765 2655,2860 2655,2960 2855,3160 2855,3250.9 2854.16,3251.73 U1.12
V12: P4.12 U1.13 | length 677.1
  Top Layer w10: P4.12@2560,2665 2570,2665 2690,2785 2690,2954.85 2901.73,3166.58 U1.13
VBAT: P6.1 P7.1 Q1.1 R1.2 R5.2 | length 2585.9
  Top Layer w40: R1.2 3230.04,4290.2 3232.32,4292.48 3242.52,4292.48 3270.04,4320 3320,4320 ; R5.2 3320,4222.52 3320,4320 ; P7.1 3895,4550 3895,4800 3945,4850 ; Q1.1 4455,4675 4280,4850 3945,4850 ; 3320,4320 3421.85,4421.85 P6.1 3425,4548.15 3425,4805 3470,4850 3945,4850
VREF: C1.2 P11.1 U1.35 | length 808.3
  Top Layer w15: U1.35 3218.58,3448.58 3245,3475 3245,3595 P11.1 3596.42,3963.58 C1.2
pads on no net: J1.2 P2.1 T1.2 T1.5 U1.6 U1.21 U1.22 U1.23 U1.24 U1.31 U1.32 U1.36 U1.37 U1.46

## Polygon pours and split planes (outlines as drawn)
BGND on Bottom Layer "BGND_L02_P006" (solid, remove dead copper, pour order 6): 2395,4905 4930,4905 4930,2360 2395,2360
BGND on Top Layer "BGND_L01_P005" (solid, remove dead copper, pour order 5): 2395,4905 2395,2360 4930,2360 4930,4905

## Keep-outs
Keep-Out Layer:
  the board outline again, w10

## Other copper
Top Layer:
  pour cut-out: 3420,3250 4755,3250 4755,2765 3420,2765
  pour cut-out: 3990,3927.5 4005,3912.5 4005,3260 4015,3260 4015,3927.5 3995,3927.5
  pour cut-out: 4015,3270 3505,3270 3505,3260 4015,3260
  pour cut-out: 4015,3915 3680,3915 3680,3925 4015,3925
  pour cut-out: 3675,3925 3675,3775 3685,3775 3685,3925
  pour cut-out: 3505,3785 3685,3785 3685,3775 3505,3775
  pour cut-out: 3520,3265 3505,3265 3505,3785 3520,3785

## Silkscreen, mask and mechanical layers (free items; w line width, h text height)
Top Overlay:
  drawing of 10 lines, arcs and shapes, not listed
  text "BATT CONN" at 3123,4783 h40
  text "MOTOR CONN" at 3573,4783 h40
  text "Current" at 2598,4623 h35
  text "Sensing" at 2593,4569.66 h35
  text "VREF" at 3712,3898 h35 r90
  text "BGND" at 3437,3893 h35 r90
  text "12V" at 4687,3813 h40 r90
  text "BGND" at 4487,3773 h40 r90
  text "V1" at 2428,3743 h35
  text "V2" at 2428,3643 h35
  text "V3" at 2428,3543 h35
  text "V4" at 2428,3443 h35
  text "V5" at 2428,3343 h35
  text "V6" at 2428,3243 h35
  text "V7" at 2428,3143 h35
  text "TX+" at 4633,3108 h35
  text "V8" at 2428,3043 h35
  text "V9" at 2428,2943 h35
  text "V10" at 2413,2843 h35
  text "TX-" at 4633,2833 h35
  text "V11" at 2418,2748 h35
  text "V12" at 2413,2643 h35
  text "LTC2949 Test Board" at 4267,2537 h30
  text "Leo & Naveela" at 4270,2480 h25
  text "IOVCC" at 3128,2428 h35
  text "SCL" at 2673,2423 h35
  text "SDA" at 2803,2423 h35
  text "SDI" at 3958,2403 h35
  text "SDO" at 4073,2403 h35